# EAGLE board Two_stage_amp (EAGLE 9.6.2)
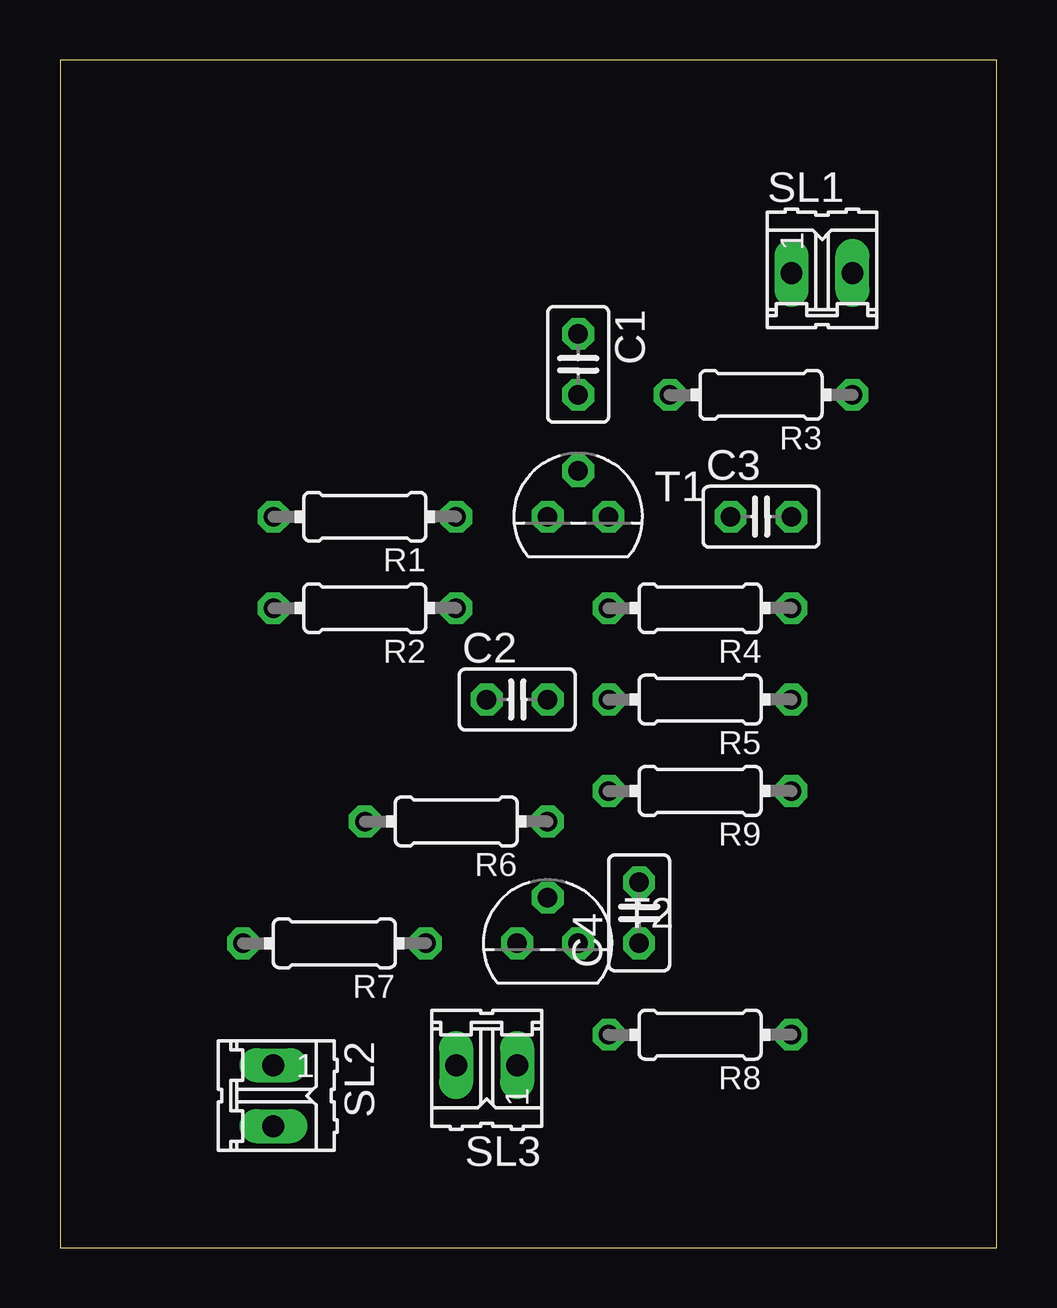
[diagram p0: board, top side]
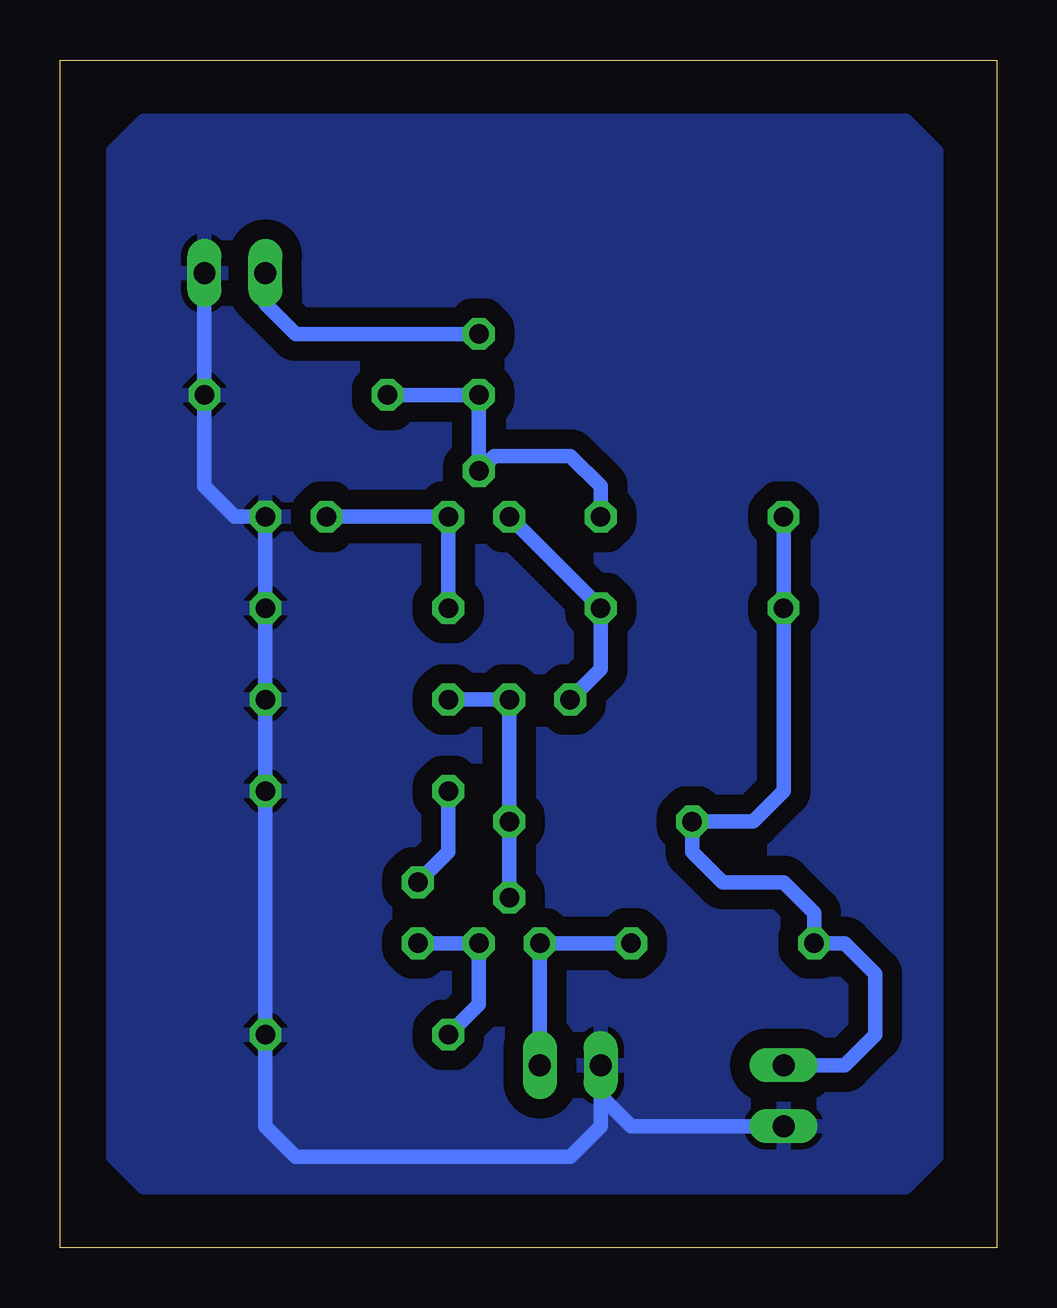
[diagram p1: board, bottom side, seen from below]

Size 39.04 x 49.52 mm. Coordinates in mm from the lower left corner, seen from the top.
Outline: 0,0 39.04,0 39.04,49.52 0,49.52 0,0
Copper layers (1*16): Top 0.035mm / dielectric 1.5mm / Bottom 0.035mm
Design rules "default": minimum track width 6mil, minimum drill 0.35mm, track to track 6mil, track to pad 6mil, pad to pad 6mil, via to via 6mil, smd to smd 6mil, copper to edge 40mil, drill to drill 6mil, minimum pad ring 10mil, minimum via ring 8mil, stop-mask expansion 4mil, vias tented up to drill 0mil, thermal gap 10mil

## Footprints (pad centres in the part's own frame; a part is rotated, then mirrored left to right if it is on the bottom)
C025-025X050 = drill 0.813 octagon: 1 -1.27,0; 2 1.27,0
0204/7 = drill 0.813 octagon: 1 -3.81,0; 2 3.81,0
02P = drill 0.914 long: 1 -1.27,0; 2 1.27,0
TO92 = drill 0.813 octagon: 1 1.27,0; 2 0,1.905; 3 -1.27,0

## Placement (x,y rotation side)
C1  1  [C025-025X050]  21.59,36.83 270 top
C2  1  [C025-025X050]  19.05,22.86 0 top
C3  20  [C025-025X050]  29.21,30.48 0 top
C4  20  [C025-025X050]  24.13,13.97 90 top
R1  4.7K  [0204/7]  12.7,30.48 180 top
R2  4.7K  [0204/7]  12.7,26.67 180 top
R3  1K  [0204/7]  29.21,35.56 180 top
R4  1K  [0204/7]  26.67,26.67 180 top
R5  1K  [0204/7]  26.67,22.86 180 top
R6  4.7K  [0204/7]  16.51,17.78 180 top
R7  4.7K  [0204/7]  11.43,12.7 180 top
R8  1K  [0204/7]  26.67,8.89 180 top
R9  50  [0204/7]  26.67,19.05 180 top
SL1  5V  [02P]  31.75,40.64 0 top
SL2  9V  [02P]  8.89,6.35 270 top
SL3  [02P]  17.78,7.62 180 top
T1  BC547  [TO92]  21.59,30.48 0 top
T2  BC547  [TO92]  20.32,12.7 0 top

## Library data of the parts
C1-C4 = rcl; SPICEPREFIX: C
R1-R9 = rcl; SPICEPREFIX: R
SL1-SL3 = con-amp-quick; OC_FARNELL: unknown; OC_NEWARK: unknown
T1 T2 = transistor

## Nets
GND: C3.2 R3.1 R4.1 R5.1 R8.1 R9.1 SL1.2 SL2.2 SL3.2
N$1: C1.2 R1.1 R3.2 T1.2
N$2: C2.1 R2.1 T1.3
N$3: C1.1 SL1.1
N$4: C2.2 R5.2 R6.1 T2.2
N$5: R1.2 R2.2 R6.2 R7.2 SL2.1
N$6: R7.1 SL3.1 T2.3
N$7: C4.1 R8.2 T2.1
N$8: C3.1 R4.2 T1.1
N$15: C4.2 R9.2

## Tracks (layer width: path | path; a pad name or v marks a point on that pad's centre or on a via)
GND
  Bottom 0.61: SL2.2 15.24,5.08 16.51,6.35 SL3.2 16.51,5.08 17.78,3.81 29.21,3.81 30.48,5.08 R8.1 R9.1 R5.1 R4.1 C3.2 31.75,30.48 33.02,31.75 R3.1 SL1.2
  pour Bottom (isolate 0.813): 3.81,46.99 35.56,46.99 36.83,45.72 36.83,3.81 35.56,2.54 3.81,2.54 2.54,3.81 2.54,5.08 2.54,45.72
N$1
  Bottom 0.61: R3.2 C1.2 T1.2 20.96,33.02 17.78,33.02 16.51,31.75 R1.1
N$2
  Bottom 0.61: T1.3 R2.1 16.51,24.13 C2.1
N$3
  Bottom 0.61: SL1.1 30.48,39.37 29.21,38.1 C1.1
N$4
  Bottom 0.61: R5.2 C2.2 R6.1 T2.2
N$5
  Bottom 0.61: R1.2 R2.2 8.89,19.05 10.16,17.78 R6.2 12.7,16.51 11.43,15.24 8.89,15.24 7.62,13.97 R7.2 6.35,12.7 5.08,11.43 5.08,8.89 6.35,7.62 SL2.1
N$6
  Bottom 0.61: R7.1 T2.3 SL3.1
N$7
  Bottom 0.61: R8.2 21.59,10.16 T2.1 C4.1
N$8
  Bottom 0.61: C3.1 T1.1 R4.2
N$15
  Bottom 0.61: C4.2 22.86,16.51 R9.2